# Altium PCB spb_sample_pcb.PcbDoc
Units mm, origin at the board's own origin, x right, y up, seen from the top; angles counter-clockwise.
Board outline 62.15 x 97.64 mm, 2 copper layers (Top Layer, Bottom Layer); 36 components, 27 nets, 168 pads, 6 vias.
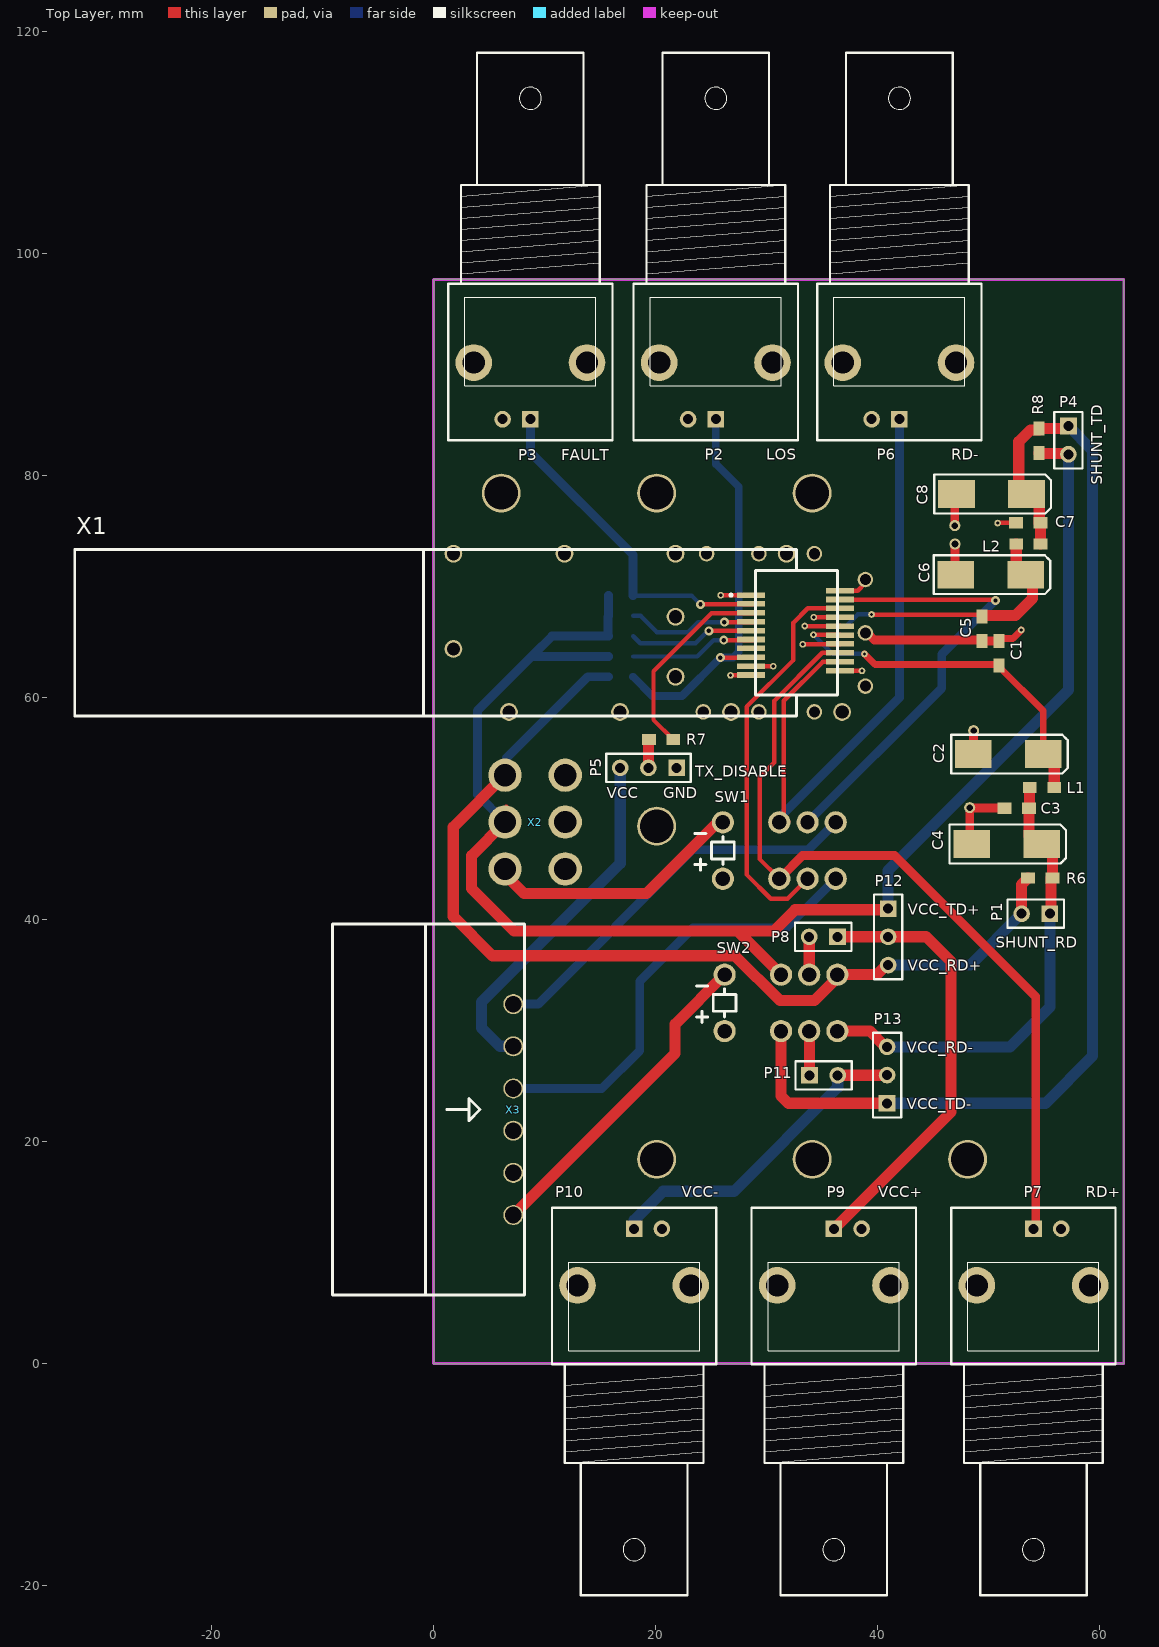
[diagram p0: Top Layer view]
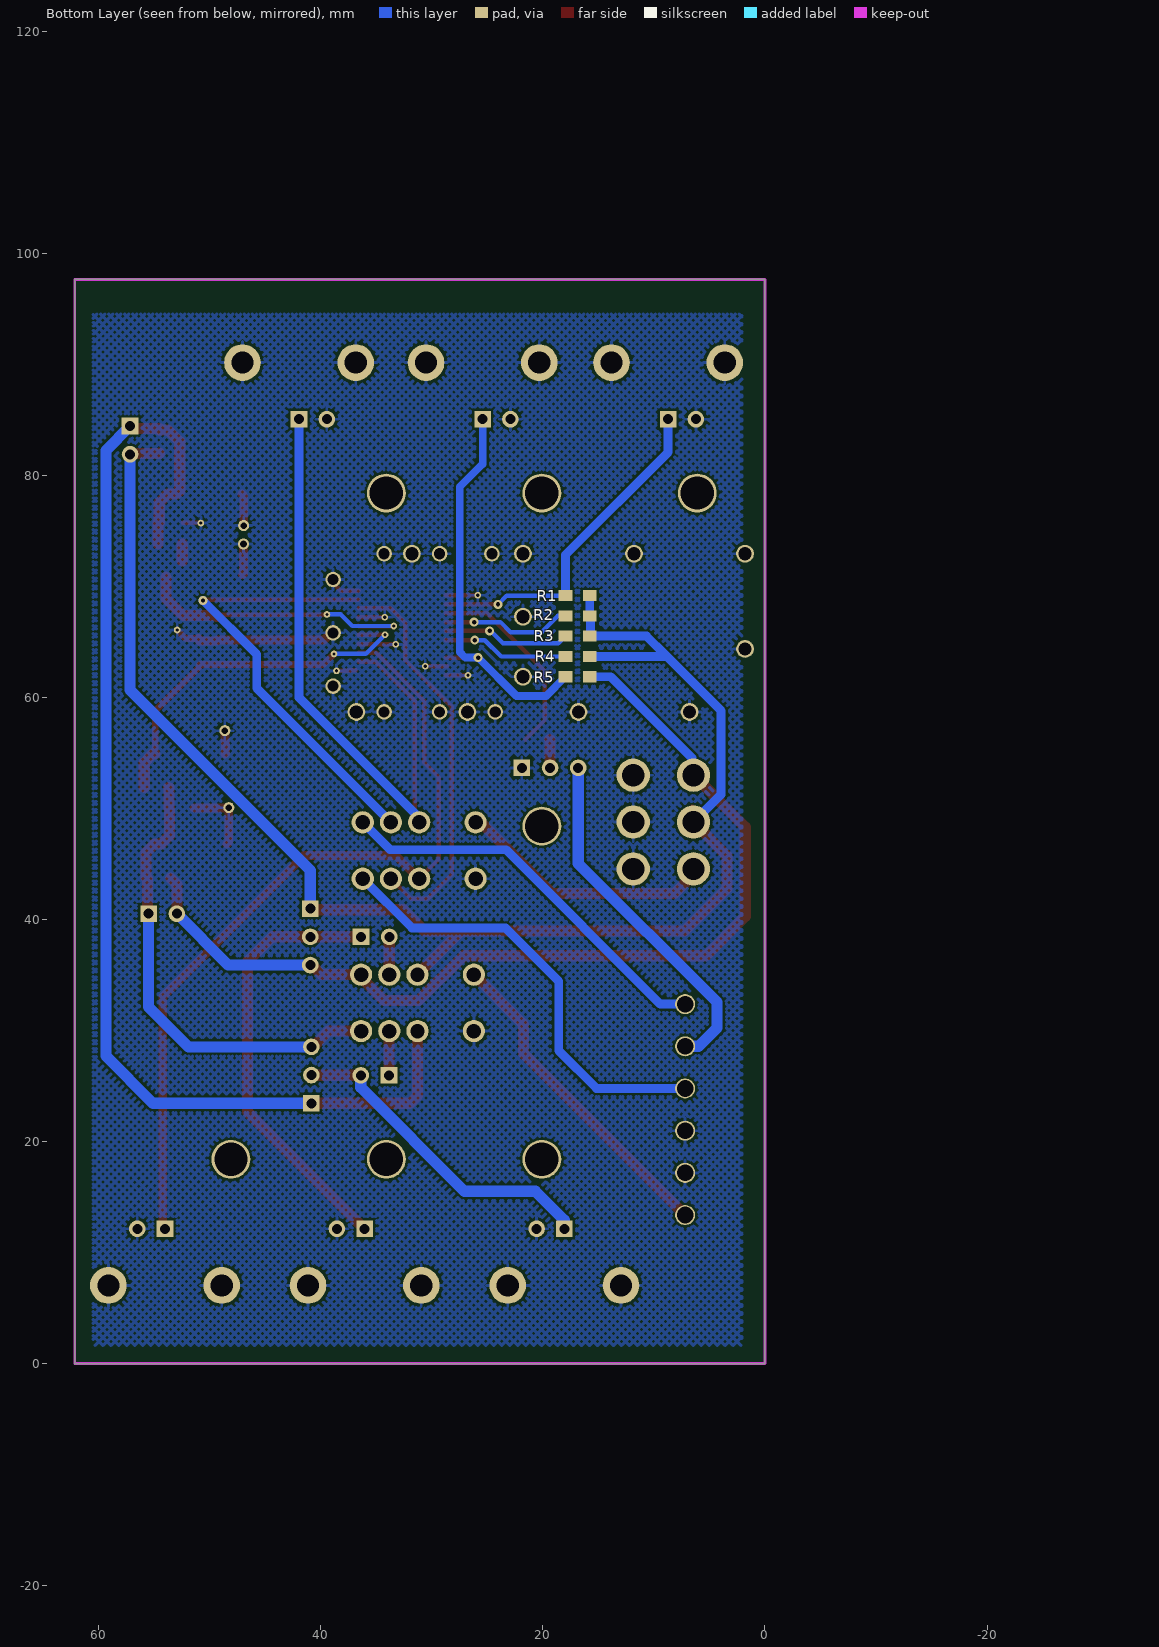
[diagram p1: Bottom Layer view, seen from below]

## Layer stack, top to bottom
Top Solder: solder mask 0.0102, Solder Resist, Dk 3.5
Top Layer: signal copper 0.0356
Dielectric 1: dielectric 0.32, FR-4, Dk 4.8
Bottom Layer: signal copper 0.0356
Bottom Solder: solder mask 0.0102, Solder Resist, Dk 3.5

## Board outline
0,0 62.154,0 62.154,97.638 0,97.638

## Design rules (kind name [scope] priority, off if disabled: settings)
Clearance [All] p1: gap=0.2 ignorepadtopadclearanceinfootprint=FALSE
HoleSize [All] p1: absolutevalues=TRUE maxlimit=2.54 minlimit=0.4 maxpercent=80.000 minpercent=20.000
MinimumAnnularRing [All] p1: minimumring=0.2
PolygonConnect [All] p1: connectstyle=Relief reliefconductorwidth=0.254 reliefentries=4 polygonreliefangle="90 Angle" airgapwidth=0.254
RoutingVias [All] p1: holewidth=0.711 width=1.27 viastyle="Through Hole" minholewidth=0.711 minwidth=1.27 maxholewidth=0.711 maxwidth=1.27
SolderMaskExpansion [All] p1: expansion=0.2
Width [All] p1: maxlimit=5 minlimit=0.3 preferedwidth=0.3
29 further rules are at their usual default settings.

## Components (designator, comment, footprint, x,y, rotation, side; value= is the part's Value field where it differs from the comment)
C1 "0,01" 0805 50.927,62.875 r90 top
C2 "10,0" TYPE_C 48.615,54.889 r0 top
C3 "0,01" 0805 53.619,50.013 r180 top
C4 "10,0" TYPE_C 48.462,46.787 r0 top
C5 "0,01" 0805 49.378,67.275 r270 top
C6 "10,0" TYPE_C 47.04,71.044 r0 top
C7 "0,01" 0805 54.661,75.717 r180 top
C8 "10,0" TYPE_C 47.094,78.308 r0 top
L1 "1,0" 0805 55.896,51.867 r180 top
L2 "1,0" 0805 52.476,73.812 r0 top
P1 "Header 2" HDR1X2 55.499,40.513 r180 top
P2 "LOS" "BNC_RA CON" 25.42,85.045 r270 top
P3 "FAULT" "BNC_RA CON" 8.718,85.045 r270 top
P4 "Header 2" HDR1X2 57.175,84.43 r270 top
P5 "Header 3" HDR1X3 21.895,53.645 r180 top
P6 "RD-" "BNC_RA CON" 41.955,85.045 r270 top
P7 "RD+" "BNC_RA CON" 54.026,12.141 r90 top
P8 "Header 2" HDR1X2 36.373,38.43 r180 top
P9 "VCC+" "BNC_RA CON" 36.045,12.141 r90 top
P10 "VCC-" "BNC_RA CON" 18.065,12.141 r90 top
P11 "Header 2" HDR1X2 33.858,25.959 r0 top
P12 "Header 3" HDR1X3 40.945,40.97 r270 top
P13 "Header 3" HDR1X3 40.843,23.444 r90 top
R1 "4.7k" 0805 15.773,69.164 r0 bottom
R2 "4.7k" 0805 15.773,67.335 r0 bottom
R3 "4.7k" 0805 15.773,65.507 r0 bottom
R4 "4.7k" 0805 15.773,63.678 r0 bottom
R5 "4.7k" 0805 15.773,61.849 r0 bottom
R6 "50" 0805 55.743,43.713 r180 top
R7 "4.7k" 0805 21.59,56.185 r180 top
R8 "50" 0805 54.534,84.217 r270 top
SW1 "Signal Relay 5VDC" "V23079 Relay" 26.06,43.663 r0 top
SW2 "Signal Relay 5VDC" "V23079 Relay" 26.213,29.947 r0 top
X1 "SFP-20pin" SFP-20pin 28.593,69.209 r270 top
X2 "POWER" POWER 14.059,48.768 r90 top
X3 "POWER_6PIN_ROW" POWER_6PIN_ROW 7.188,32.375 r270 top

## Footprints (in the part's own frame and the unit in brackets; to place one, negate y for a bottom-side part, rotate by r counter-clockwise, add the part's x,y. Pads: shape width x height; smd on the part's side, far side on the other; paste and mask are expansions set on the pad)
0805 [mm]
  rect 1.25x1 smd: 1(0,0) 2(2.2,0)
  body extent -0.73,-0.6 2.93,0.6, height 1.25
"BNC_RA CON" [mm] "Connector; BNC Elbow"
  rect 1.5x1.5 hole 0.9: 1(0,0)
  round 3.3 hole 2: 2(-5.1,5.1) 2(-5.1,-5.1)
  round 1.5 hole 0.9: 2(0,-2.5)
  silkscreen extent -33,-7.4 1.9,7.4
HDR1X2 [mm] "Connector; Header; 2 Position"
  rect 1.5x1.5 hole 0.9: 1(0,0)
  round 1.5 hole 0.9: 2(2.54,0)
  silkscreen extent -1.27,-1.27 3.81,1.27
HDR1X3 [mm] "Connector; Header; 3 Position"
  rect 1.5x1.5 hole 0.9: 1(0,0)
  round 1.5 hole 0.9: 2(2.54,0) 3(5.08,0)
  silkscreen extent -1.27,-1.27 6.35,1.27
POWER [mm] "POWER"
  round 3 hole 2: 1(4.217,7.62) 2(0,7.62) 3(-4.217,7.62) 4(4.217,2.198) 5(0,2.198) 6(-4.217,2.198)
POWER_6PIN_ROW [mm]
  round 1.8 hole 1.5: 1(0,0) 2(3.8,0) 3(7.6,0) 4(11.4,0) 5(15.2,0) 6(19,0)
  silkscreen extent -7.2,-16.3 26.2,1, body extent -7.2,-16.3 26.2,1, height 11
SFP-20pin [mm] "SFP-20pin"
  rect 0.5x2.5 smd: 1(0,0) 2(0.8,0) 3(1.6,0) 4(2.4,0) 5(3.2,0) 6(4,0) 7(4.8,0) 8(5.6,0) 9(6.4,0) 10(7.2,0) 11(6.8,8) 12(6,8) 13(5.2,8) 14(4.4,8) 15(3.6,8) 16(2.8,8) 17(2,8) 18(1.2,8) 19(0.4,8) 20(-0.4,8)
  round 1.6 hole 1.2: h(-3.725,3.2) h(-3.725,-6.8) h(-3.725,-16.8) h(-3.725,-26.8) h(1.95,-6.8) h(4.85,-26.8) h(7.35,-6.8) h(10.525,8.2) h(10.525,-1.8) h(10.525,-11.8) h(10.525,-21.8)
  round 1.4 hole 1: h(-3.725,5.7) h(-3.725,0.7) h(-3.725,-4) h(-1.4,10.3) h(3.4,10.3) h(8.2,10.3) h(10.525,5.7) h(10.525,0.7) h(10.525,-4.3)
  silkscreen extent -4.1,-60.9 10.9,7.8, body extent -4.1,-60.9 10.9,7.8, height 9
TYPE_C [mm]
  rect 3.3x2.5 smd: 1(0,0) 2(6.3,0)
  silkscreen extent -2,-1.75 8.5,1.75, body extent -1.75,-1.35 8.05,1.35, height 2.5
"V23079 Relay" [mm]
  round 2 hole 1.3: 1(7.62,5.08) 2(5.08,5.08) 3(10.16,5.08) 4(7.62,0) 5(5.08,0) 6(10.16,0) 7(0,0) 8(0,5.08)
  silkscreen extent -2.54,0.76 1.02,4.06, body extent -1.1,-1.1 11.26,6.18, height 10

## Part data
C1 C3 C5 C7: library part CAP_SMALL, "0805"
C2 C4 C6 C8: library part CAP_TANT, "SMD"
L1 L2: library part INDUCT, "0805"
P1 P4 P8 P11: "Header, 2-Pin", LatestRevisionDate=17-Jul-2002, LatestRevisionNote="Re-released for DXP Platform.", Publisher="Altium Limited"
P2 P3 P6 P7 P9 P10: library part BNC, "BNC Elbow Connector", LatestRevisionDate=17-Jul-2002, LatestRevisionNote="Re-released for DXP Platform.", Publisher="Altium Limited"
P5 P12 P13: "Header, 3-Pin", LatestRevisionDate=17-Jul-2002, LatestRevisionNote="Re-released for DXP Platform.", Publisher="Altium Limited"
R1 R2 R3 R4 R5 R6 R7 R8: library part RES0805, "0805"
SW1 SW2: library part SWITCH

## Free pads (board coordinates)
  round 0.6 hole 0.3: 3(25.857,69.19) 3(26.746,61.976) 3(30.594,62.802) 3(33.249,64.77) 3(33.426,66.421) 3(34.214,65.634) 3(34.239,67.208) 3(38.583,62.382) 3(38.811,63.906) 3(39.446,67.462) 3(50.8,75.692) 3(52.934,66.065)
  round 1 hole 0.6: 4(46.965,73.812) 5(46.942,75.463) 6(48.641,56.998) 7(48.285,50.063)
  round 3.5 hole 3: h(6.093,78.397) h(20.093,18.397) h(20.093,48.397) h(20.093,78.397) h(34.093,18.397) h(34.093,78.397) h(48.093,18.397)

## Via types
v1: diameter 0.8, hole 0.4, Top Layer to Bottom Layer, 6 vias

## Nets (pads, with @x,y where several pads share a name; then routed paths per layer and width w, separated by ;. In a path a pad name is that pad's centre, name@x,y a point inside that pad or via, vN(x,y) a via of type N, cw(c..) or ccw(c..) an arc to the next point about the centre after c; other vN are vias at no path point)
/SWITCH: SW1.8 X2.3 | length 23.5
  Top Layer w1: X2.3 6.439,44.056 8.145,42.35 19.186,42.35 25.578,48.743 SW1.8
/SWITCH_VCC: SW2.8 X3.6 | length 29.5
  Top Layer w1: X3.6 21.742,27.929 21.742,30.556 SW2.8
DETECT: R4.2 X1.6 | length 11.4
  Top Layer w0.4: v1(26.137,65.151) 28.727,65.151 X1.6@28.753,65.177
  Bottom Layer w0.4: R4.2 23.749,63.678 25.222,65.151 v1(26.137,65.151)
FAULT: P3.1 R1.2 X1.2 | length 30.8
  Top Layer w0.4: v1@24.028,68.351 v1(24.041,68.364) 24.054,68.377 X1.2@28.753,68.377
  Bottom Layer w0.4: R1.2 23.241,69.164 v1(24.041,68.364)
  Bottom Layer w0.8: P3.1 8.718,82.073 17.973,72.817 R1.2
GND: C1.2 C2.1 C3.2 C4.1 C5.2 C6.1 C7.2 C8.1 P2.2 P3.2 P5.1 P6.2 P7.2 P9.2 P10.2 pad.3@25.857,69.19 pad.3@26.746,61.976 pad.3@30.594,62.802 pad.3@33.249,64.77 pad.3@34.239,67.208 pad.3@38.583,62.382 pad.3@50.8,75.692 pad.3@52.934,66.065 pad.4 pad.5 pad.6 pad.7 SW1.7 SW2.7 X1.1 X1.9 X1.10 X1.11 X1.14 X1.17 X1.20 X1.h X2.4 X2.5 X2.6 X3.4 X3.5 | length 48.3
  Top Layer w0.4: pad.3@25.857,69.19 25.864,69.183 28.746,69.183 X1.1@28.753,69.177 ; pad.3@26.746,61.976 X1.10@28.753,61.976 ; X1.9@28.6,62.802 pad.3@30.594,62.802 ; pad.3@33.249,64.77 33.268,64.79 36.574,64.79 X1.14 ; pad.3@34.24,67.209 X1.17 X1.17@36.606,67.196 ; X1.20 38.215,69.609 38.893,70.288 X1.h@38.893,70.609 ; X1.11@36.83,62.459 37.435,62.459 37.359,62.382 pad.3@38.583,62.382 ; pad.3@50.813,75.705 C7.2@52.448,75.705
  Top Layer w0.6: C1.2@51.027,65.3 52.168,65.3 pad.3@52.934,66.065
  Top Layer w0.8: X1.h@38.893,65.809 39.056,65.809 39.714,65.151 49.301,65.151 C5.2 C1.2 50.927,65.2 C1.2@51.027,65.3 ; pad.5 46.942,78.157 C8.1 ; pad.4 46.965,71.119 C6.1 ; C4.1 48.285,46.964 pad.7 48.311,50.038 51.394,50.038 C3.2 ; C2.1 48.59,54.914 pad.6
LOS: P2.1 R5.2 X1.8 | length 36.7
  Top Layer w0.4: v1@25.781,63.627 v1(25.831,63.577) X1.8@28.753,63.577
  Bottom Layer w0.7: R5.2 19.701,60.122 22.377,60.122 v1(25.831,63.577) 26.975,63.577 27.483,64.084 27.483,78.958 25.42,81.021 P2.1
NetC1_1: C1.1 C2.2 L1.1 pad.3@34.214,65.634 pad.3@38.811,63.906 X1.15 | length 33.4
  Top Layer w0.4: pad.3@34.214,65.634 34.226,65.621 36.581,65.621 X1.15
  Top Layer w0.6: pad.3@38.811,63.906 39.767,62.951 C1.1@50.927,62.951 ; C1.1 50.927,62.75 54.915,58.762 C2.2
  Top Layer w1: C2.2 55.146,54.889 55.896,54.139 L1.1
  Bottom Layer w0.4: pad.3@34.214,65.634 35.941,63.906 pad.3@38.811,63.906
NetC5_1: C5.1 C6.2 L2.1 pad.3@33.426,66.421 pad.3@39.446,67.462 X1.16 | length 28.4
  Top Layer w0.4: pad.3@33.426,66.421 33.438,66.409 X1.16 X1.16@36.643,66.459 ; pad.3@39.446,67.437 49.215,67.437 C5.1
  Top Layer w1: C5.1 49.378,67.386 52.426,67.386 53.924,68.885 53.924,70.79 C6.2@53.95,70.815 ; C6.2@52.476,72.288 L2.1
  Bottom Layer w0.4: pad.3@33.426,66.421 37.16,66.421 38.202,67.462 pad.3@39.446,67.462
NetP5_2: P5.2 R7.2 | length 2.2
  Top Layer w1: P5.2@19.383,54.079 19.355,54.051 19.355,56.185 R7.2
NetP8_1: P8.1 P9.1 P12.2 | length 39.6
  Top Layer w1: P9.1 46.584,22.679 46.584,36.195 44.336,38.443 36.386,38.443 P8.1
NetP8_2: P8.2 SW2.1 | length 3.4
  Top Layer w1: SW2.1 P8.2
NetP10_1: P10.1 P11.2 P13.2 | length 29.6
  Top Layer w1: P11.2 36.411,25.971 40.831,25.971 P13.2
  Bottom Layer w1: P10.1 18.065,12.909 20.676,15.519 27.051,15.519 36.398,24.867 P11.2
NetP11_1: P11.1 SW2.4 | length 4
  Top Layer w1: SW2.4 33.846,29.934 33.846,25.971 P11.1
RD+: P7.1 SW1.5 X1.13 | length 75.1
  Top Layer w0.4: SW1.5@30.988,43.815 29.362,45.441 29.362,52.81 30.683,54.13 30.683,59.675 35.017,64.009 X1.13
  Top Layer w0.8: SW1.5@30.988,43.815 31.293,43.815 33.223,45.745 41.529,45.745 54.229,33.045 54.229,12.344 P7.1
RD-: P6.1 SW1.2 X1.12 | length 58.3
  Top Layer w0.4: SW1.2@31.953,48.819 31.547,49.225 31.547,59.69 35.066,63.209 X1.12
  Bottom Layer w0.8: SW1.2 31.14,49.149 41.955,59.964 P6.1
SCL: R3.2 X1.5 | length 11.5
  Top Layer w0.4: v1@24.79,65.989 v1(24.803,65.977) X1.5@28.753,65.977
  Bottom Layer w0.4: R3.2 18.608,64.872 23.59,64.872 24.695,65.977 v1(24.803,65.977)
SDA: R2.2 X1.4 | length 11.8
  Top Layer w0.4: v1(26.187,66.777) X1.4@28.753,66.777
  Bottom Layer w0.4: R2.2 18.644,67.335 20.117,65.862 22.911,65.862 23.825,66.777 v1(26.187,66.777)
TD+: SW1.4 X1.18 | length 36.3
  Top Layer w0.4: SW1.4 31.877,41.859 30.378,41.859 28.193,44.044 28.193,59.14 32.41,63.357 32.41,66.726 33.694,68.009 X1.18
TD-: SW1.1 X1.19 | length 41
  Top Layer w0.4: X1.19 36.606,68.796 50.533,68.796 v1(50.609,68.72)
  Bottom Layer w0.8: SW1.1 45.771,60.833 45.771,63.882 v1(50.609,68.72)
TX_DISABLE: R7.1 X1.3 | length 18
  Top Layer w0.4: R7.1@21.577,56.197 19.812,57.963 19.812,62.357 25.032,67.577 X1.3@28.753,67.577
VCC_RD: P1.2 P12.3 R5.1 R6.2 SW2.3 X2.1 | length 88.3
  Top Layer w1: X2.1 1.778,48.324 1.778,40.259 5.31,36.727 27.154,36.727 31.191,32.69 34.307,32.69 36.339,34.722 36.373,34.722 SW2.3 39.946,35.027 40.81,35.89 P12.3 ; P1.2 52.959,43.129 R6.2
  Bottom Layer w0.8: X2.1@6.566,54.306 6.566,54.522 13.894,61.849 R5.1
  Bottom Layer w1: P12.3 48.336,35.89 P1.2
VCC_RD-: C3.1 C4.2 L1.2 P1.1 P13.3 R6.1 SW2.6 | length 42.5
  Top Layer w1: SW2.6 39.286,29.947 40.708,28.524 P13.3 ; L1.2 53.657,51.867 53.657,50.013 C3.1 53.619,47.537 54.369,46.787 C4.2 54.993,46.787 55.743,46.037 R6.1 55.621,43.713 55.621,40.635 P1.1
  Bottom Layer w1: P13.3 51.918,28.524 55.499,32.106 P1.1
VCC_TD: P4.2 P12.1 R1.1 R2.1 R3.1 R4.1 R8.2 SW2.2 X2.2 | length 140.7
  Top Layer w0.5: X2.2@6.566,50.089 X2.2@7.538,49.117
  Top Layer w1: X2.2 3.404,45.732 3.404,42.799 7.239,38.964 27.356,38.964 ; SW2.2 27.356,38.964 ; P12.1 40.843,40.869 32.563,40.869 30.658,38.964 27.356,38.964 ; R8.2 54.534,81.953 57.112,81.953 P4.2
  Bottom Layer w0.8: X2.2 3.945,51.262 3.945,58.783 8.992,63.83 ; R4.1 9.144,63.678 8.992,63.83 ; R3.1 R3.1@15.697,65.507 ; R1.1 R2.1 15.697,67.259 R3.1@15.697,65.507 ; 8.992,63.83 10.668,65.507 R3.1@15.697,65.507
  Bottom Layer w1: P12.1 40.945,44.42 57.175,60.65 P4.2
VCC_TD-: C7.1 C8.2 L2.2 P4.1 P13.1 R8.1 SW2.5 | length 109.3
  Top Layer w1: SW2.5 31.293,24.106 31.955,23.444 P13.1 ; L2.2 54.669,73.812 54.669,75.717 C7.1 54.544,75.717 54.544,77.558 53.794,78.308 C8.2 52.994,78.308 52.705,78.597 52.705,83.033 53.764,84.092 54.534,84.092 R8.1 56.962,84.217 P4.1
  Bottom Layer w1: P13.1 55.116,23.444 59.36,27.688 59.36,82.245 P4.1
VCC_TX_DISABLE: P5.3 X3.2 | length 32.1
  Bottom Layer w1: X3.2 5.986,28.575 4.318,30.243 4.318,32.543 16.815,45.04 P5.3
VDD_VAR1: SW1.3 X3.1 | length 35.8
  Bottom Layer w0.8: X3.1 9.413,32.375 23.317,46.279 33.757,46.279 SW1.3
VDD_VAR2: SW1.6 X3.3 | length 40.5
  Bottom Layer w0.8: X3.3 15.154,24.775 18.567,28.189 18.567,34.417 23.381,39.231 31.788,39.231 SW1.6
pads on no net: X1.7

## Polygon pours and split planes (outlines as drawn)
GND on Bottom Layer "Bottom Layer-GND" (hatched 45Degree grid 0.508 track 0.3, pour order 0): 2.083,94.501 60.503,94.501 60.503,1.651 2.083,1.651

## Keep-outs
Keep-Out Layer:
  the board outline again, w0.254

## Silkscreen, mask and mechanical layers (free items; w line width, h text height)
Top Overlay:
  text "SHUNT_TD" at 60.223,79.146 h1 r90
  text "TX_DISABLE" at 23.571,52.857 h1
  text "VCC" at 15.621,50.902 h1
  text "GND" at 20.701,50.902 h1
  text "VCC_TD+" at 42.723,40.437 h1
  text "SHUNT_RD" at 50.622,37.44 h1
  text "VCC_RD+" at 42.723,35.357 h1
  text "VCC_RD-" at 42.621,27.991 h1
  text "VCC_TD-" at 42.621,22.911 h1